# Altium PCB PCB2.PcbDoc
Units mil, origin at the board's own origin, x right, y up, seen from the top; angles counter-clockwise.
Board outline 6000 x 4000 mil, 2 copper layers (Top Layer, Bottom Layer); 19 components, 128 nets, 183 pads, 0 vias.
Unrouted connection lines stored in the file: 55.
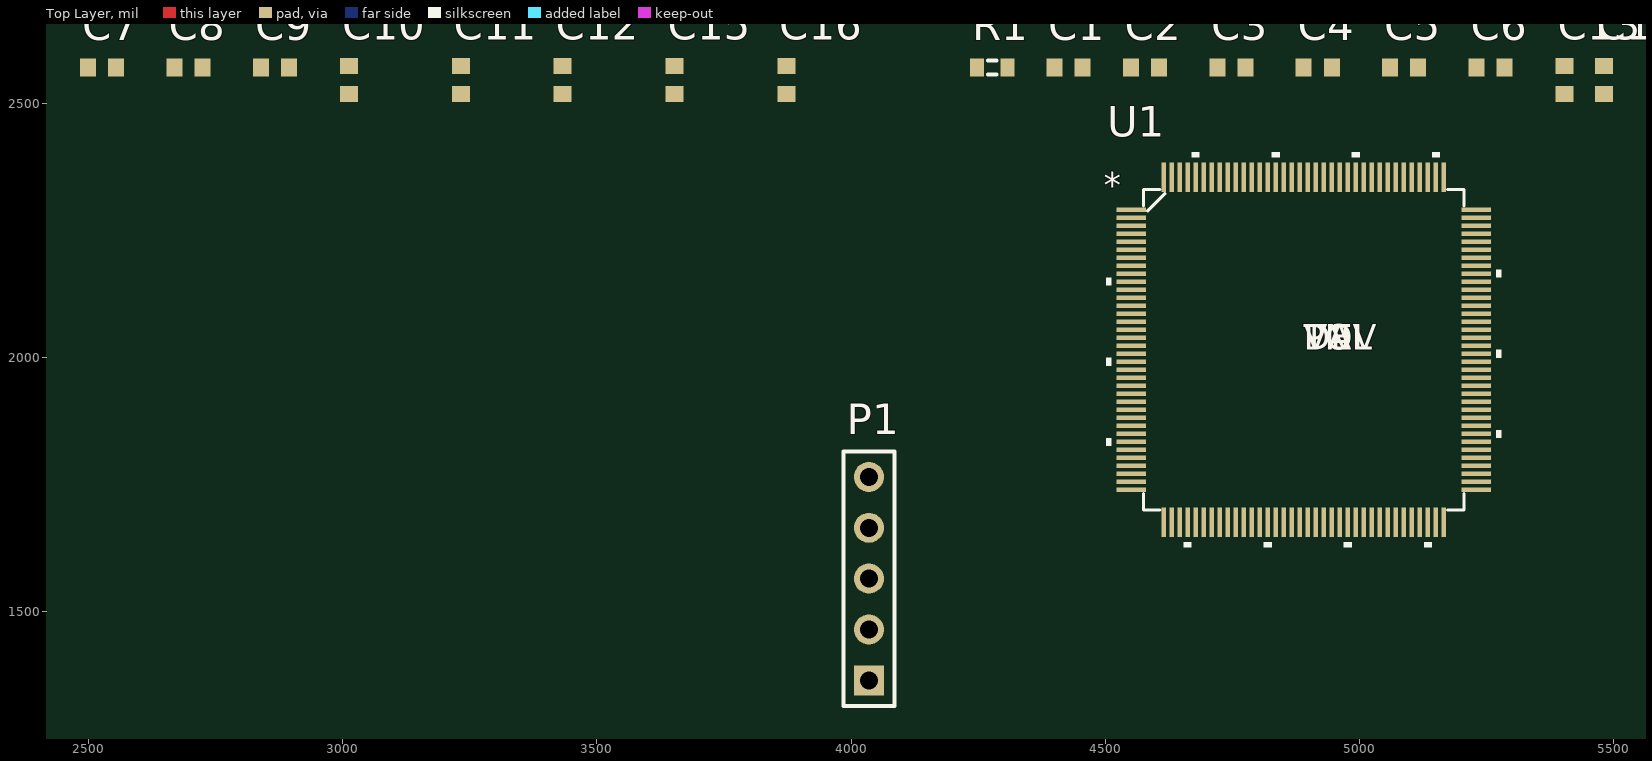
[diagram p0: Top Layer view]
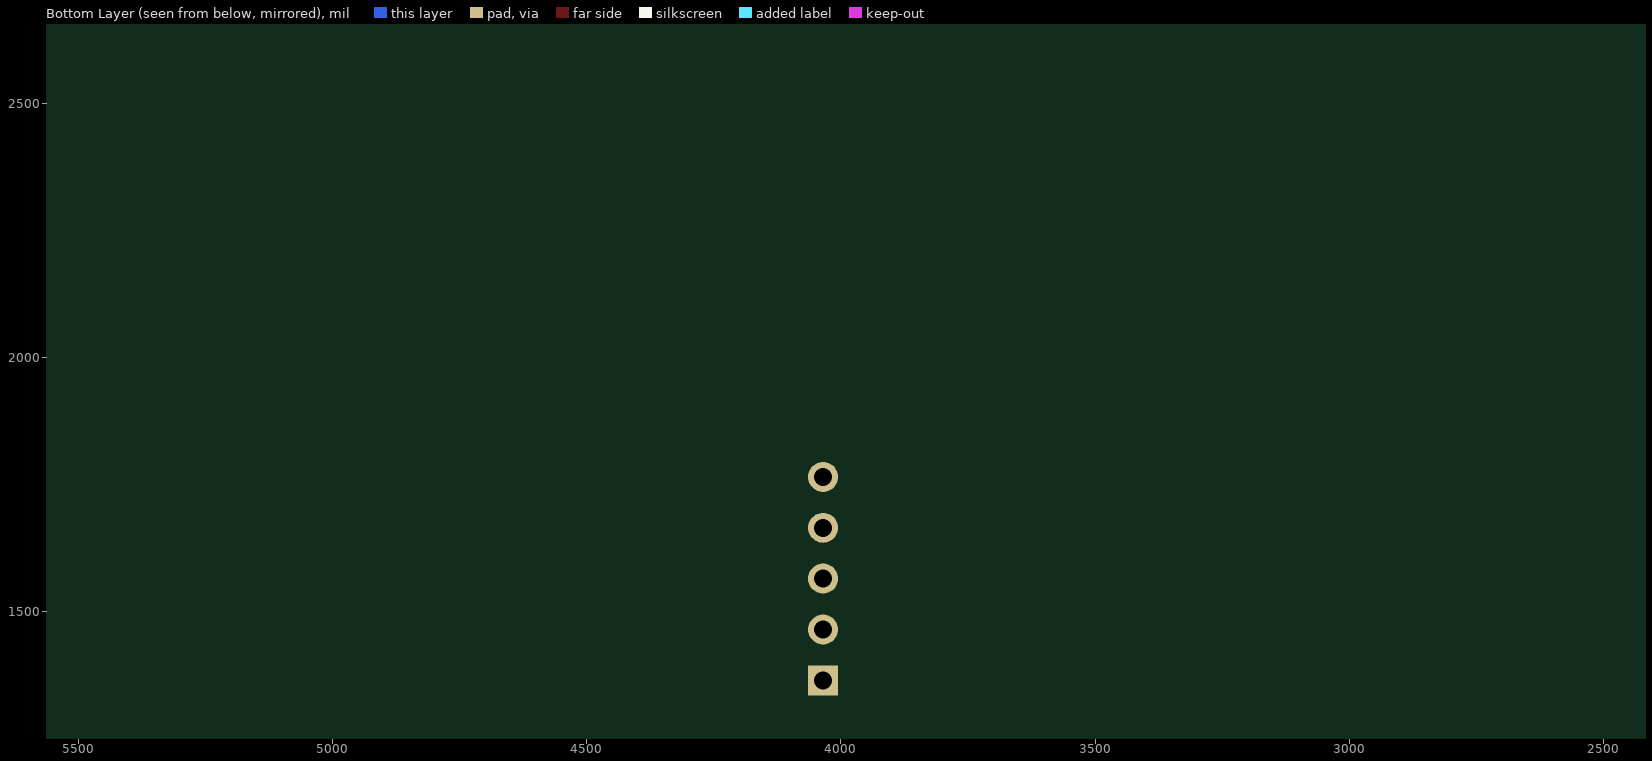
[diagram p1: Bottom Layer view, seen from below]

## Layer stack, top to bottom
Top Solder: solder mask 0.4, Solder Resist, Dk 3.5
Top Layer: signal copper 1.4
Dielectric 1: dielectric 12.6, FR-4, Dk 4.8
Bottom Layer: signal copper 1.4
Bottom Solder: solder mask 0.4, Solder Resist, Dk 3.5

## Board outline
1000,1000 7000,1000 7000,5000 1000,5000

## Design rules (kind name [scope] priority, off if disabled: settings)
Clearance [All] p1: gap=10
PolygonConnect [All] p1: connectstyle=Relief reliefconductorwidth=10 reliefentries=4 polygonreliefangle="90 Angle" airgapwidth=10
RoutingVias [All] p1: holewidth=28 width=50 viastyle="Through Hole" minholewidth=28 minwidth=50 maxholewidth=28 maxwidth=50
SolderMaskExpansion [All] p1: expansion=4
UnpouredPolygon [All] p1: allowunpoured=FALSE
Width [All] p1: maxlimit=10 minlimit=10 preferedwidth=10
29 further rules are at their usual default settings.

## Components (designator, comment, footprint, x,y, rotation, side; value= is the part's Value field where it differs from the comment)
C1 "Cap Semi" 1608[0603] 4427.56,2570 r0 top
C2 "Cap Semi" 1608[0603] 4577.56,2570 r0 top
C3 "Cap Semi" 1608[0603] 4747.56,2570 r0 top
C4 "Cap Semi" 1608[0603] 4917.56,2570 r0 top
C5 "Cap Semi" 1608[0603] 5087.56,2570 r0 top
C6 "Cap Semi" 1608[0603] 5257.56,2570 r0 top
C7 "Cap Semi" 1608[0603] 2527.56,2570 r0 top
C8 "Cap Semi" 1608[0603] 2697.56,2570 r0 top
C9 "Cap Semi" 1608[0603] 2867.56,2570 r0 top
C10 "Cap Semi" 1608[0603] 3012.56,2545 r90 top
C11 "Cap Semi" 1608[0603] 3232.56,2545 r90 top
C12 "Cap Semi" 1608[0603] 3432.56,2545 r90 top
C13 "Cap Semi" 1608[0603] 5402.56,2545 r90 top
C14 "Cap Semi" 1608[0603] 5480,2545 r90 top
C15 "Cap Semi" 1608[0603] 3652.56,2545 r90 top
C16 "Cap Semi" 1608[0603] 3872.56,2545 r90 top
P1 "Header 5" HDR1X5 4035,1365 r90 top
R1 "Res3" J1-0603 4277.56,2570 r0 top
U1 "PIC32MZXXXXEC_G_" TQFP144_16X16MC 4890,2015 r0 top

## Footprints (in the part's own frame and the unit in brackets; to place one, negate y for a bottom-side part, rotate by r counter-clockwise, add the part's x,y. Pads: shape width x height; smd on the part's side, far side on the other; paste and mask are expansions set on the pad)
1608[0603] [mm] "Chip Capacitor, Body 1.6x0.8mm, IPC High Density"
  rect 0.8x0.9 smd: 1(-0.7,0) 2(0.7,0)
  body extent -0.87,-0.48 0.87,0.48, height 1.3
HDR1X5 [mm] "Connector; Header; 5 Position"
  rect 1.5x1.5 hole 0.9: 1(0,0)
  round 1.5 hole 0.9: 2(2.54,0) 3(5.08,0) 4(7.62,0) 5(10.16,0)
  silkscreen extent -1.27,-1.27 11.43,1.27
J1-0603 [mm] "Chip Resistor, Body 1.6x0.8mm, IPC High Density"
  rect 0.7x0.9 smd: 1(-0.75,0) 2(0.75,0)
  silkscreen extent -0.2,-0.35 0.2,0.35, body extent -0.85,-0.48 0.85,0.48, height 0.9
TQFP144_16X16MC [mil]
  rect 58x9 smd: 1(-339.5,275.59) 2(-339.5,259.84) 3(-339.5,244.09) 4(-339.5,228.35) 5(-339.5,212.6) 6(-339.5,196.85) 7(-339.5,181.1) 8(-339.5,165.35) 9(-339.5,149.61) 10(-339.5,133.86) 11(-339.5,118.11) 12(-339.5,102.36) 13(-339.5,86.61) 14(-339.5,70.87) 15(-339.5,55.12) 16(-339.5,39.37) 17(-339.5,23.62) 18(-339.5,7.87) 19(-339.5,-7.87) 20(-339.5,-23.62) 21(-339.5,-39.37) 22(-339.5,-55.12) 23(-339.5,-70.87) 24(-339.5,-86.61) 25(-339.5,-102.36) 26(-339.5,-118.11) 27(-339.5,-133.86) 28(-339.5,-149.61) 29(-339.5,-165.35) 30(-339.5,-181.1) 31(-339.5,-196.85) 32(-339.5,-212.6) 33(-339.5,-228.35) 34(-339.5,-244.09) 35(-339.5,-259.84) 36(-339.5,-275.59) 73(339.5,-275.59) 74(339.5,-259.84) 75(339.5,-244.09) 76(339.5,-228.35) 77(339.5,-212.6) 78(339.5,-196.85) 79(339.5,-181.1) 80(339.5,-165.35) 81(339.5,-149.61) 82(339.5,-133.86) 83(339.5,-118.11) 84(339.5,-102.36) 85(339.5,-86.61) 86(339.5,-70.87) 87(339.5,-55.12) 88(339.5,-39.37) 89(339.5,-23.62) 90(339.5,-7.87) 91(339.5,7.87) 92(339.5,23.62) 93(339.5,39.37) 94(339.5,55.12) 95(339.5,70.87) 96(339.5,86.61) 97(339.5,102.36) 98(339.5,118.11) 99(339.5,133.86) 100(339.5,149.61) 101(339.5,165.35) 102(339.5,181.1) 103(339.5,196.85) 104(339.5,212.6) 105(339.5,228.35) 106(339.5,244.09) 107(339.5,259.84) 108(339.5,275.59)
  rect 9x58 smd: 37(-275.59,-339.5) 38(-259.84,-339.5) 39(-244.09,-339.5) 40(-228.35,-339.5) 41(-212.6,-339.5) 42(-196.85,-339.5) 43(-181.1,-339.5) 44(-165.35,-339.5) 45(-149.61,-339.5) 46(-133.86,-339.5) 47(-118.11,-339.5) 48(-102.36,-339.5) 49(-86.61,-339.5) 50(-70.87,-339.5) 51(-55.12,-339.5) 52(-39.37,-339.5) 53(-23.62,-339.5) 54(-7.87,-339.5) 55(7.87,-339.5) 56(23.62,-339.5) 57(39.37,-339.5) 58(55.12,-339.5) 59(70.87,-339.5) 60(86.61,-339.5) 61(102.36,-339.5) 62(118.11,-339.5) 63(133.86,-339.5) 64(149.61,-339.5) 65(165.35,-339.5) 66(181.1,-339.5) 67(196.85,-339.5) 68(212.6,-339.5) 69(228.35,-339.5) 70(244.09,-339.5) 71(259.84,-339.5) 72(275.59,-339.5) 109(275.59,339.5) 110(259.84,339.5) 111(244.09,339.5) 112(228.35,339.5) 113(212.6,339.5) 114(196.85,339.5) 115(181.1,339.5) 116(165.35,339.5) 117(149.61,339.5) 118(133.86,339.5) 119(118.11,339.5) 120(102.36,339.5) 121(86.61,339.5) 122(70.87,339.5) 123(55.12,339.5) 124(39.37,339.5) 125(23.62,339.5) 126(7.87,339.5) 127(-7.87,339.5) 128(-23.62,339.5) 129(-39.37,339.5) 130(-55.12,339.5) 131(-70.87,339.5) 132(-86.61,339.5) 133(-102.36,339.5) 134(-118.11,339.5) 135(-133.86,339.5) 136(-149.61,339.5) 137(-165.35,339.5) 138(-181.1,339.5) 139(-196.85,339.5) 140(-212.6,339.5) 141(-228.35,339.5) 142(-244.09,339.5) 143(-259.84,339.5) 144(-275.59,339.5)
  silkscreen extent -388,-388 388,388

## Part data
C1 C2 C3 C4 C5 C6 C7 C8 C9 C10 C11 C12 C13 C14 C15 C16: "Capacitor (Semiconductor SIM Model)"
P1: "Header, 5-Pin"
R1: "Resistor"
U1: "Imported"

## Nets (pads, with @x,y where several pads share a name; then routed paths per layer and width w, separated by ;. In a path a pad name is that pad's centre, name@x,y a point inside that pad or via, vN(x,y) a via of type N, cw(c..) or ccw(c..) an arc to the next point about the centre after c; other vN are vias at no path point)
GND: C1.1 C2.1 C3.1 C4.1 C5.1 C6.1 C7.1 C8.1 C9.1 C10.1 C11.1 C12.1 C13.1 C14.1 C15.1 C16.1 P1.3 U1.17 U1.32 U1.42 U1.54 U1.63 U1.89 U1.108 U1.123 U1.136
NetP1_1: P1.1 R1.1 U1.20
NetP1_4: P1.4 U1.38
NetP1_5: P1.5 U1.39
NetU1_1: U1.1
NetU1_2: U1.2
NetU1_3: U1.3
NetU1_4: U1.4
NetU1_5: U1.5
NetU1_6: U1.6
NetU1_7: U1.7
NetU1_8: U1.8
NetU1_9: U1.9
NetU1_10: U1.10
NetU1_11: U1.11
NetU1_12: U1.12
NetU1_13: U1.13
NetU1_14: U1.14
NetU1_15: U1.15
NetU1_16: U1.16
NetU1_19: U1.19
NetU1_21: U1.21
NetU1_22: U1.22
NetU1_23: U1.23
NetU1_24: U1.24
NetU1_25: U1.25
NetU1_26: U1.26
NetU1_27: U1.27
NetU1_28: U1.28
NetU1_29: U1.29
NetU1_30: U1.30
NetU1_31: U1.31
NetU1_34: U1.34
NetU1_35: U1.35
NetU1_36: U1.36
NetU1_37: U1.37
NetU1_40: U1.40
NetU1_43: U1.43
NetU1_44: U1.44
NetU1_45: U1.45
NetU1_46: U1.46
NetU1_47: U1.47
NetU1_48: U1.48
NetU1_49: U1.49
NetU1_50: U1.50
NetU1_51: U1.51
NetU1_52: U1.52
NetU1_53: U1.53
NetU1_56: U1.56
NetU1_57: U1.57
NetU1_58: U1.58
NetU1_59: U1.59
NetU1_60: U1.60
NetU1_61: U1.61
NetU1_62: U1.62
NetU1_65: U1.65
NetU1_66: U1.66
NetU1_67: U1.67
NetU1_68: U1.68
NetU1_69: U1.69
NetU1_70: U1.70
NetU1_71: U1.71
NetU1_72: U1.72
NetU1_73: U1.73
NetU1_74: U1.74
NetU1_75: U1.75
NetU1_76: U1.76
NetU1_77: U1.77
NetU1_78: U1.78
NetU1_79: U1.79
NetU1_80: U1.80
NetU1_81: U1.81
NetU1_82: U1.82
NetU1_83: U1.83
NetU1_84: U1.84
NetU1_85: U1.85
NetU1_86: U1.86
NetU1_87: U1.87
NetU1_90: U1.90
NetU1_91: U1.91
NetU1_92: U1.92
NetU1_93: U1.93
NetU1_94: U1.94
NetU1_95: U1.95
NetU1_96: U1.96
NetU1_97: U1.97
NetU1_98: U1.98
NetU1_99: U1.99
NetU1_100: U1.100
NetU1_101: U1.101
NetU1_102: U1.102
NetU1_103: U1.103
NetU1_104: U1.104
NetU1_105: U1.105
NetU1_106: U1.106
NetU1_109: U1.109
NetU1_110: U1.110
NetU1_111: U1.111
NetU1_112: U1.112
NetU1_113: U1.113
NetU1_114: U1.114
NetU1_115: U1.115
NetU1_116: U1.116
NetU1_117: U1.117
NetU1_118: U1.118
NetU1_119: U1.119
NetU1_120: U1.120
NetU1_121: U1.121
NetU1_124: U1.124
NetU1_125: U1.125
NetU1_126: U1.126
NetU1_127: U1.127
NetU1_128: U1.128
NetU1_129: U1.129
NetU1_130: U1.130
NetU1_131: U1.131
NetU1_132: U1.132
NetU1_133: U1.133
NetU1_134: U1.134
NetU1_135: U1.135
NetU1_138: U1.138
NetU1_139: U1.139
NetU1_140: U1.140
NetU1_141: U1.141
NetU1_142: U1.142
NetU1_143: U1.143
NetU1_144: U1.144
VCC: C1.2 C2.2 C3.2 C4.2 C5.2 C6.2 C7.2 C8.2 C9.2 C10.2 C11.2 C12.2 C13.2 C14.2 C15.2 C16.2 P1.2 R1.2 U1.18 U1.33 U1.41 U1.55 U1.64 U1.88 U1.107 U1.122 U1.137

## Text inside footprints (layer, text, board x,y; h text height)
U1: Top Overlay "TOL" at 4890,2015 h50; Top Overlay "VAL" at 4890,2015 h50; Top Overlay "DEV" at 4890,2015 h50; Top Overlay "PN" at 4890,2015 h50; Top Overlay "*" at 4496.5,2313.46 h50; Mechanical 1 "RefDes2" at 4890,2015 h50; Mechanical 1 "*" at 4496.5,2313.46 h50